# EAGLE board Super-Regenerative-FM-2 (EAGLE 7.2.0)
Pendelaudion Aus dem Sperrschicht-Feldeffekttransistor BF256B
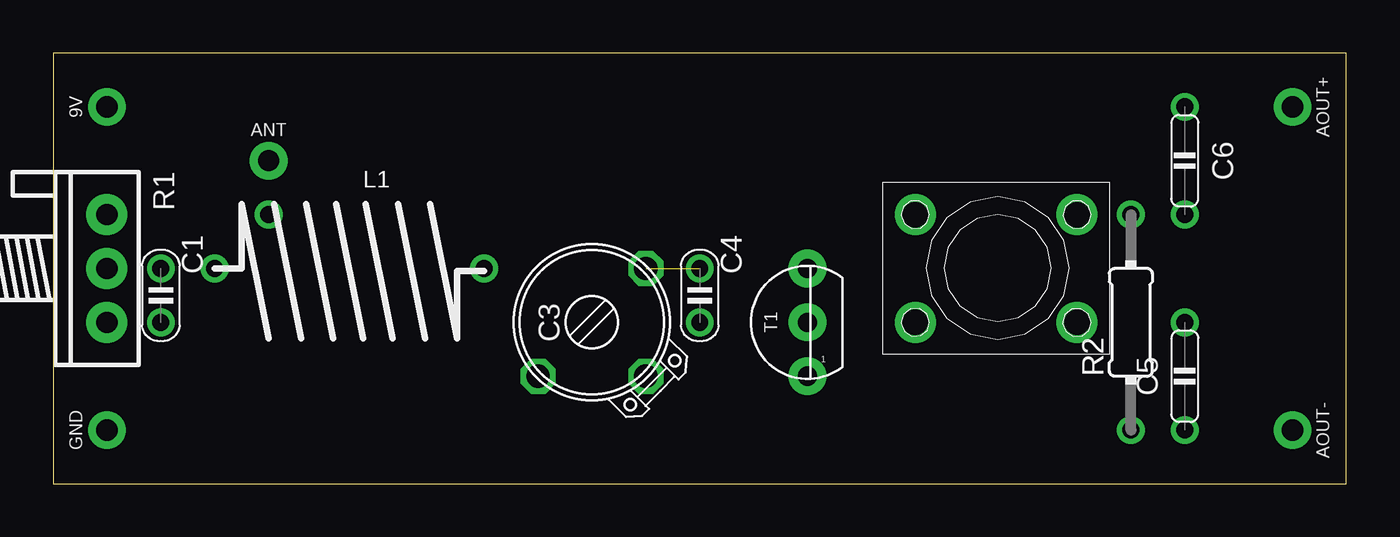
[diagram p0: board, top side]
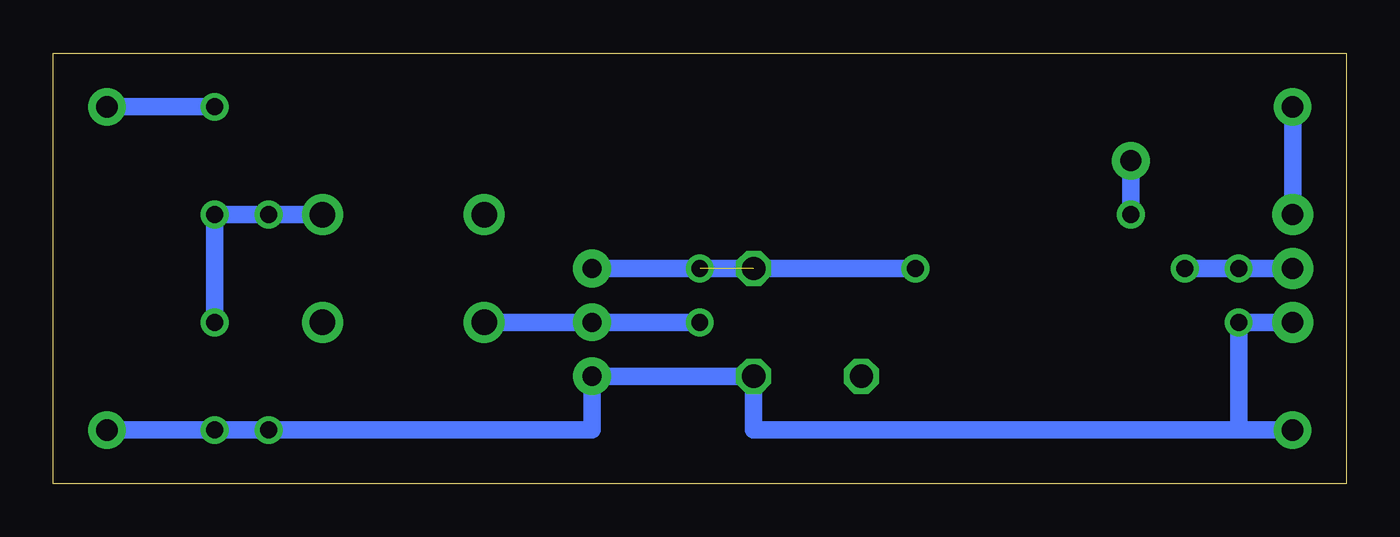
[diagram p1: board, bottom side, seen from below]

Size 60.96 x 20.32 mm. Coordinates in mm from the lower left corner, seen from the top.
Outline: 0,0 60.96,0 60.96,20.32 0,20.32 0,0
Copper layers (1*16): Top 0.035mm / dielectric 1.5mm / Bottom 0.035mm
Design rules "default": minimum track width 10mil, minimum drill 24mil, track to track 8mil, track to pad 8mil, pad to pad 8mil, via to via 8mil, smd to smd 8mil, copper to edge 40mil, drill to drill 8mil, minimum pad ring 10mil, minimum via ring 8mil, stop-mask expansion 4mil, vias tented up to drill 0mil, thermal gap 10mil
Net classes: 0 default: width 0.61 mm

## Footprints (pad centres in the part's own frame; a part is rotated, then mirrored left to right if it is on the bottom)
SPAD = drill 1 pad 1.778: 1 0,0
C025-020X036 = drill 0.8: 1 0,0; 2 2.54,0
TRIM-2222-808 = drill 1.1 octagon: 1 -2.54,2.54; 2 -2.54,-2.54; 3 2.54,-2.54
C050-020X044 = drill 0.8: 1 2.54,0; 2 -2.54,0
L-08/12-X-TAP1 = drill 0.8: 1 -6.35,0; 2 6.35,0; 3 -3.81,2.54
L-BODY = drill 1.2 pad 1.93: 1 -3.81,2.54; 2 3.81,2.54; 3 -3.81,-2.54; 4 3.81,-2.54
POT = drill 1 pad 1.93: 1 -2.54,0; 2 0,0; 3 2.54,0
0204/10 = drill 0.8: 1 -5.08,0; 2 5.08,0
TO92 = drill 0.9 pad 1.778: 1 0,2.54; 2 0,0; 3 0,-2.54

## Placement (x,y rotation side)
9V  SPAD  [SPAD]  2.54,17.78 0 top
ANT  ANT  [SPAD]  10.16,15.24 270 top
AOUT+  SPAD  [SPAD]  58.42,17.78 180 top
AOUT-  SPAD  [SPAD]  58.42,2.54 180 top
C1  1n  [C025-020X036]  5.08,10.16 270 top
C3  15p  [TRIM-2222-808]  25.4,7.62 90 top
C4  4.7pF  [C025-020X036]  30.48,10.16 270 top
C5  4.7n  [C050-020X044]  53.34,5.08 90 top
C6  100n  [C050-020X044]  53.34,15.24 270 top
GND  SPAD  [SPAD]  2.54,2.54 0 top
L1  0.22μH  [L-08/12-X-TAP1]  13.97,10.16 0 top
L2  3.3μH  [L-BODY]  44.45,10.16 0 top
R1  1kΩ  [POT]  2.54,10.16 270 top
R2  10kΩ  [0204/10]  50.8,7.62 90 top
T1  BF256B  [TO92]  35.56,7.62 180 top

## Library data of the parts
9V ANT AOUT+ AOUT- GND = pad
C1 C4-C6 = c
C3 = cap-trim
L1 L2 = l
R1 R2 = r
T1 = t

## Nets
GND: AOUT-.1 C1.2 C3.2 C5.2 GND.1 R1.3 R2.1 T1.1
N$1: 9V.1 R1.1
N$2: C3.3 C4.1 L1.2 T1.3
N$3: C1.1 L1.1 R1.2
N$4: ANT.1 L1.3
N$5: C4.2 L2.3 T1.2
N$6: C5.1 C6.1 L2.2 R2.2
N$8: AOUT+.1 C6.2

## Tracks (layer width: path | path; a pad name or v marks a point on that pad's centre or on a via)
GND
  Bottom 0.813: AOUT-.1 C5.2 R2.1 35.56,2.54 T1.1 C3.2 27.94,2.54 5.08,2.54 | GND.1 5.08,2.54 | 5.08,2.54 C1.2 R1.3
N$1
  Bottom 0.813: R1.1 9V.1
N$2  (1 unrouted)
  Bottom 0.813: L1.2 C3.3 T1.3
N$3
  Bottom 0.813: R1.2 C1.1 L1.1
N$4
  Bottom 0.813: L1.3 ANT.1
N$5
  Bottom 0.813: C4.2 T1.2 L2.3
N$6
  Bottom 0.813: L2.2 R2.2 C6.1 C5.1
N$8
  Bottom 0.813: C6.2 AOUT+.1